# EAGLE board CT_schematic (EAGLE 7.6.0)

Size 100 x 80 mm. Coordinates in mm from the lower left corner, seen from the top.
Outline: 0,0 100,0 100,80 0,80 0,0
Copper layers (1*16): Top 0.035mm / dielectric 1.5mm / Bottom 0.035mm
Design rules "default": minimum track width 10mil, minimum drill 24mil, track to track 8mil, track to pad 8mil, pad to pad 8mil, via to via 8mil, smd to smd 8mil, copper to edge 40mil, drill to drill 8mil, minimum pad ring 10mil, minimum via ring 8mil, stop-mask expansion 4mil, vias tented up to drill 0mil, thermal gap 10mil

## Footprints (pad centres in the part's own frame; a part is rotated, then mirrored left to right if it is on the bottom)
C0603 = smd 0.8 x 0.8: 1 -0.762,0; 2 0.762,0
C0402 = smd 0.5 x 0.5: 1 -0.508,0; 2 0.508,0
C1210 = smd 1.2 x 2.5: 1 -1.524,0; 2 1.524,0
C1206 = smd 1.3 x 1.6: 1 -1.524,0; 2 1.524,0
L0603 = smd 0.8 x 0.8: 1 -0.762,0; 2 0.762,0
R0603 = smd 0.8 x 0.8: 1 -0.762,0; 2 0.762,0
TSSOP20-I = smd 0.4 x 1.35: 1 -2.925,-2.875; 2 -2.275,-2.875; 3 -1.625,-2.875; 4 -0.975,-2.875; 5 -0.325,-2.875; 6 0.325,-2.875; 7 0.975,-2.875; 8 1.625,-2.875; 9 2.275,-2.875; 10 2.925,-2.875; 11 2.925,2.875; 12 2.275,2.875; 13 1.625,2.875; 14 0.975,2.875; 15 0.325,2.875; 16 -0.325,2.875; 17 -0.975,2.875; 18 -1.625,2.875; 19 -2.275,2.875; 20 -2.925,2.875
SAMTEC_FTSH-105-01-L-DV-K = smd 0.762 x 2.794: 1 -2.54,-2.032; 2 -2.54,2.032; 3 -1.27,-2.032; 4 -1.27,2.032; 5 0,-2.032; 6 0,2.032; 7 1.27,-2.032; 8 1.27,2.032; 9 2.54,-2.032; 10 2.54,2.032
AT24C02D = smd 1.6 x 0.6: 1 -2.475,1.905 | smd 1.55 x 0.6: 2 -2.475,0.635; 3 -2.475,-0.635; 4 -2.475,-1.905; 5 2.475,-1.905; 6 2.475,-0.635; 7 2.475,0.635; 8 2.475,1.905
WNG008 = smd 0.45 x 0.55: 1 -1.27,0; 2 0,0; 3 1.27,0; 4 2.54,0; 5 2.54,7.5; 6 1.27,7.5; 7 0,7.5; 8 -1.27,7.53 | smd 4.9 x 4.75: PAD 0.635,3.75
ASEK = smd 1.4 x 1: 1 -1.1,-0.8; 2 1.1,-0.8; 3 1.1,0.8; 4 -1.1,0.8
ASFL1 = smd 1.7 x 1.5: 1 -1.27,-1.1; 2 1.27,-1.1; 3 1.27,1.1; 4 -1.27,1.1
SOIC-8_EP = smd 1.6 x 0.533: 1 -2.921,1.905; 2 -2.921,0.635; 3 -2.921,-0.635; 4 -2.921,-1.905; 5 2.921,-1.905; 6 2.921,-0.635; 7 2.921,0.635; 8 2.921,1.905 | smd 2.54 x 3.302: EPAD 0,0 | drill 0.406 pad 0.406: P$1 -0.508,0.635; P$2 0.381,0.635; P$3 -0.508,-0.635; P$4 0.381,-0.635
DFN8_2X3MC = smd 0.813 x 0.305: 1 -1.398,0.75; 2 -1.398,0.25; 3 -1.398,-0.25; 4 -1.398,-0.75; 5 1.398,-0.75; 6 1.398,-0.25; 7 1.398,0.25; 8 1.398,0.75 | smd 1.753 x 1.549: 9 0,0
JST-2-SMD = smd 1 x 4.6: 1 -1,-3.7; 2 1,-3.7 | smd 1.6 x 3.4: NC1 -3.4,1.5; NC2 3.4,1.5
FCI_10118193-0001LF = smd 0.4 x 1.35: 1 -1.3,2.675; 2 -0.65,2.675; 3 0,2.675; 4 0.65,2.675; 5 1.3,2.675 | smd 1.6 x 1.4: 6 -3.2,2.45; 7 3.2,2.45 | smd 1.9 x 1.9: 8 -1.2,0; 9 1.2,0 | hole 0.5: -3.3,0; 3.3,0
SON-6 = smd 0.55 x 0.3: 1 -0.355,0.5 | smd 0.52 x 0.3: 2 -0.37,0; 3 -0.37,-0.5; 4 0.37,-0.5; 5 0.37,0; 6 0.37,0.5
SW_4-1437565-2 = smd 1.4 x 2.1: 1 -2.23,4.55; 2 -2.23,-4.55; 3 2.23,4.55; 4 2.23,-4.55
LGM67K-G1J2-24-Z = smd 0.8 x 1.4: A -2,0; C 0,0
NC7SZ125M5X = smd 1.3 x 0.7: 1 -1.3,0.95; 2 -1.3,0; 3 -1.3,-0.95; 4 1.3,-0.95; 5 1.3,0.95

## Placement (x,y rotation side)
C1  1e-07  [C0603]  -38.1,57.15 0 top  (outside the outline)
C2  1e-07  [C0603]  -41.91,57.15 0 top  (outside the outline)
C3  1e-07  [C0603]  -45.72,57.15 0 top  (outside the outline)
C4  1e-07  [C0603]  -49.53,57.15 0 top  (outside the outline)
C5  4.7e-06  [C0603]  -34.29,57.15 0 top  (outside the outline)
C6  1e-08  [C0603]  -53.34,57.15 0 top  (outside the outline)
C7  1e-06  [C0603]  -57.15,57.15 0 top  (outside the outline)
C8  1e-07  [C0402]  -45.72,62.23 0 top  (outside the outline)
C9  1e-08  [C0402]  -49.53,62.23 0 top  (outside the outline)
C10  1e-08  [C0402]  -53.34,62.23 0 top  (outside the outline)
C11  1e-08  [C0402]  -57.15,62.23 0 top  (outside the outline)
C12  1e-08  [C0402]  -60.96,62.23 0 top  (outside the outline)
C13  1e-05  [C1210]  -57.15,38.1 0 top  (outside the outline)
C14  1e-05  [C1210]  -63.5,38.1 0 top  (outside the outline)
C15  1e-05  [C1210]  -16.51,46.99 0 top  (outside the outline)
C16  1e-05  [C1210]  -22.86,46.99 0 top  (outside the outline)
C17  1e-07  [C0402]  -64.77,62.23 0 top  (outside the outline)
C18  1e-05  [C1206]  -29.21,45.72 0 top  (outside the outline)
C19  1e-05  [C1206]  -35.56,45.72 0 top  (outside the outline)
C20  1e-08  [C0402]  -15.24,67.31 0 top  (outside the outline)
C21  1e-08  [C0402]  -19.05,67.31 0 top  (outside the outline)
F1  240.0  [L0603]  -60.96,57.15 0 top  (outside the outline)
R1  10000.0  [R0603]  -15.24,52.07 0 top  (outside the outline)
R2  1000.0  [R0603]  -64.77,57.15 0 top  (outside the outline)
R3  1600.5  [R0603]  -15.24,62.23 0 top  (outside the outline)
R4  4700.0  [R0603]  -19.05,62.23 0 top  (outside the outline)
R5  2200.0  [R0603]  -22.86,62.23 0 top  (outside the outline)
R6  2200.0  [R0603]  -26.67,62.23 0 top  (outside the outline)
R7  10000.0  [R0603]  -20.32,52.07 0 top  (outside the outline)
R8  10000.0  [R0603]  -25.4,52.07 0 top  (outside the outline)
R9  10000.0  [R0603]  -30.48,52.07 0 top  (outside the outline)
R10  10000.0  [R0603]  -35.56,52.07 0 top  (outside the outline)
R11  5.0  [R0603]  -30.48,62.23 0 top  (outside the outline)
R12  10000.0  [R0603]  -40.64,52.07 0 top  (outside the outline)
R13  10000.0  [R0603]  -45.72,52.07 0 top  (outside the outline)
R14  10000.0  [R0603]  -50.8,52.07 0 top  (outside the outline)
R15  10000.0  [R0603]  -55.88,52.07 0 top  (outside the outline)
R16  10000.0  [R0603]  -60.96,52.07 0 top  (outside the outline)
R17  10000.0  [R0603]  -66.04,52.07 0 top  (outside the outline)
R18  10000.0  [R0603]  -15.24,57.15 0 top  (outside the outline)
R19  4031.5447154472  [R0603]  -57.15,45.72 0 top  (outside the outline)
R20  2200.0  [R0603]  -34.29,62.23 0 top  (outside the outline)
R21  10000.0  [R0603]  -20.32,57.15 0 top  (outside the outline)
R22  10000.0  [R0603]  -25.4,57.15 0 top  (outside the outline)
R23  9100.0  [R0603]  -38.1,62.23 0 top  (outside the outline)
R24  680000.0  [R0603]  -62.23,45.72 0 top  (outside the outline)
R25  120000.0  [R0603]  -67.31,45.72 0 top  (outside the outline)
R26  2000.0  [R0603]  -41.91,62.23 0 top  (outside the outline)
R27  10000.0  [R0603]  -30.48,57.15 0 top  (outside the outline)
U1  STM32L011F4P6  [TSSOP20-I]  -24.13,20.32 0 top  (outside the outline)
U2  FTSH-105-01-L-DV-K  [SAMTEC_FTSH-105-01-L-DV-K]  -35.56,7.62 0 top  (outside the outline)
U3  AT24C02D-SSHM-T  [AT24C02D]  -25.4,30.48 0 top  (outside the outline)
U4  S25FL128SDPNFI001  [WNG008]  -44.45,17.78 0 top  (outside the outline)
U5  ASEK-32.768KHz-ECST  [ASEK]  -29.21,39.37 0 top  (outside the outline)
U6  ASFL1-12MHZ-NCS  [ASFL1]  -43.18,30.48 0 top  (outside the outline)
U7  MIC5234YME  [SOIC-8_EP]  -36.83,38.1 0 top  (outside the outline)
U8  MCP73831T-2ACI/MC  [DFN8_2X3MC]  -27.94,66.04 0 top  (outside the outline)
U9  S2B-PH-SM4-TB(LF)(SN)  [JST-2-SMD]  -57.15,21.59 0 top  (outside the outline)
U10  10118193-0001LF  [FCI_10118193-0001LF]  -52.07,29.21 0 top  (outside the outline)
U11  TPS3895ADRYR  [SON-6]  -21.59,66.04 0 top  (outside the outline)
U12  4-1437565-2  [SW_4-1437565-2]  -57.15,6.35 0 top  (outside the outline)
U13  Q65110A2395  [LGM67K-G1J2-24-Z]  -45.72,38.1 0 top  (outside the outline)
U14  nc7sz125m5x  [NC7SZ125M5X]  -40.64,45.72 0 top  (outside the outline)
U15  nc7sz125m5x  [NC7SZ125M5X]  -46.99,45.72 0 top  (outside the outline)

## Library data of the parts
C1-C21 F1 R1-R27 U1-U15 = circuit_tree

## Nets
CLK_U1_2: U1.2 U5.3
CLK_U1_6: U1.6 U6.3
GND: C1.2 C2.2 C3.2 C4.2 C5.2 C6.2 C7.2 C8.2 C9.2 C10.2 C11.2 C12.2 C13.2 C14.2 C15.2 C16.2 C17.2 C18.2 C19.2 C20.2 C21.2 R2.2 R7.2 R11.2 R12.2 R14.2 R15.2 R20.2 R23.2 R25.2 R26.2 U1.15 U2.3 U2.5 U3.4 U4.4 U4.PAD U5.2 U6.2 U7.7 U7.EPAD U8.6 U8.9 U9.2 U10.5 U10.6 U10.7 U10.8 U10.9 U11.2 U13.C U14.2 U14.3 U15.1 U15.3
INPUT_USBPOWER_5V: C18.1 R27.2 U8.1 U8.2 U10.1
NET_U1_1: R7.1 U1.1
NET_U1_4: R4.1 U1.4 U15.4
NET_U1_5: C6.1 C7.1 F1.1 U1.5
NET_U1_9: R3.1 U1.9 U13.A
NET_U1_14: R1.1 U1.14 U12.3 U12.4
NET_U1_17: R5.1 U1.17 U3.6
NET_U1_18: R6.1 U1.18 U3.5
NET_U2_9: R11.1 U2.9
NET_U3_1: R13.1 U3.1
NET_U3_2: R14.1 U3.2
NET_U3_3: R15.1 U3.3
NET_U3_7: R12.1 U3.7
NET_U4_3: R16.1 U4.3
NET_U4_7: R18.1 U4.7
NET_U7_4: R19.2 R20.1 U7.4
NET_U8_5: R27.1 U8.5
NET_U8_8: R26.1 U8.8
NET_U11_1: R22.1 R23.1 U11.1
NET_U11_3: R24.2 R25.1 U11.3
NET_U11_4: R21.1 U11.4 U14.4 U15.2
NET_U12_1: R2.1 U12.1 U12.2
PROC_SPI1_MISO: U1.12 U4.2
PROC_SPI1_MOSI: U1.13 U4.5
PROC_SPI1_NSS: R17.1 U1.10 U4.1
PROC_SPI1_SCK: U1.11 U4.6
PROC_SYS_SWCLK: R9.1 U1.20 U2.4
PROC_SYS_SWDIO: R10.1 U1.19 U2.2
RST_OUT_U2_JTAG_RST_B: R8.1 U2.10 U14.1
VCC_S1_3V7: C13.1 C14.1 C19.1 U7.5 U7.8 U8.3 U8.4 U9.1
VCC_TIER1_3V3: C1.1 C2.1 C3.1 C4.1 C5.1 C8.1 C9.1 C10.1 C11.1 C12.1 C15.1 C16.1 C17.1 C20.1 C21.1 F1.2 R1.2 R3.2 R4.2 R5.2 R6.2 R8.2 R9.2 R10.2 R13.2 R16.2 R17.2 R18.2 R19.1 R21.2 R22.2 R24.1 U1.16 U2.1 U3.8 U4.8 U5.4 U6.4 U7.1 U11.6 U14.5 U15.5

## Tracks (layer width: path | path; a pad name or v marks a point on that pad's centre or on a via)
CLK_U1_2  (1 unrouted)
CLK_U1_6  (1 unrouted)
GND  (54 unrouted)
INPUT_USBPOWER_5V  (4 unrouted)
NET_U1_1  (1 unrouted)
NET_U1_4  (2 unrouted)
NET_U1_5  (3 unrouted)
NET_U1_9  (2 unrouted)
NET_U1_14  (3 unrouted)
NET_U1_17  (2 unrouted)
NET_U1_18  (2 unrouted)
NET_U2_9  (1 unrouted)
NET_U3_1  (1 unrouted)
NET_U3_2  (1 unrouted)
NET_U3_3  (1 unrouted)
NET_U3_7  (1 unrouted)
NET_U4_3  (1 unrouted)
NET_U4_7  (1 unrouted)
NET_U7_4  (2 unrouted)
NET_U8_5  (1 unrouted)
NET_U8_8  (1 unrouted)
NET_U11_1  (2 unrouted)
NET_U11_3  (2 unrouted)
NET_U11_4  (3 unrouted)
NET_U12_1  (2 unrouted)
PROC_SPI1_MISO  (1 unrouted)
PROC_SPI1_MOSI  (1 unrouted)
PROC_SPI1_NSS  (2 unrouted)
PROC_SPI1_SCK  (1 unrouted)
PROC_SYS_SWCLK  (2 unrouted)
PROC_SYS_SWDIO  (2 unrouted)
RST_OUT_U2_JTAG_RST_B  (2 unrouted)
VCC_S1_3V7  (7 unrouted)
VCC_TIER1_3V3  (41 unrouted)